# EAGLE board d232_board (EAGLE 9.5.0)
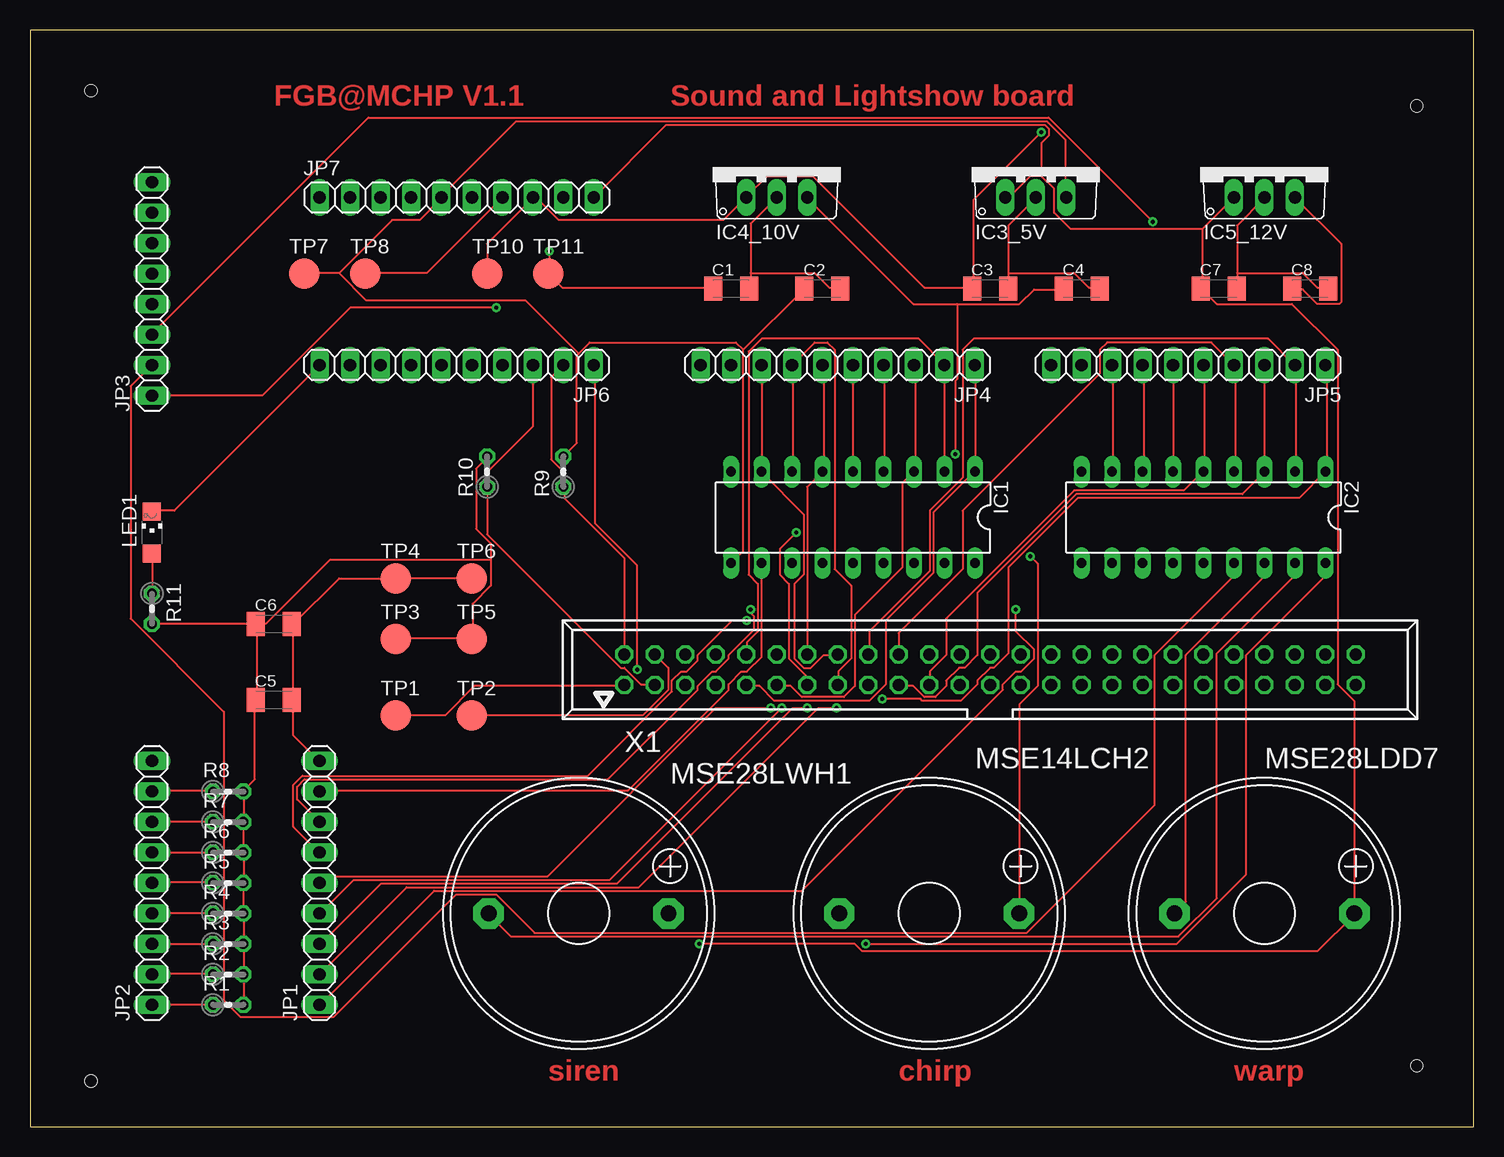
[diagram p0: board, top side]
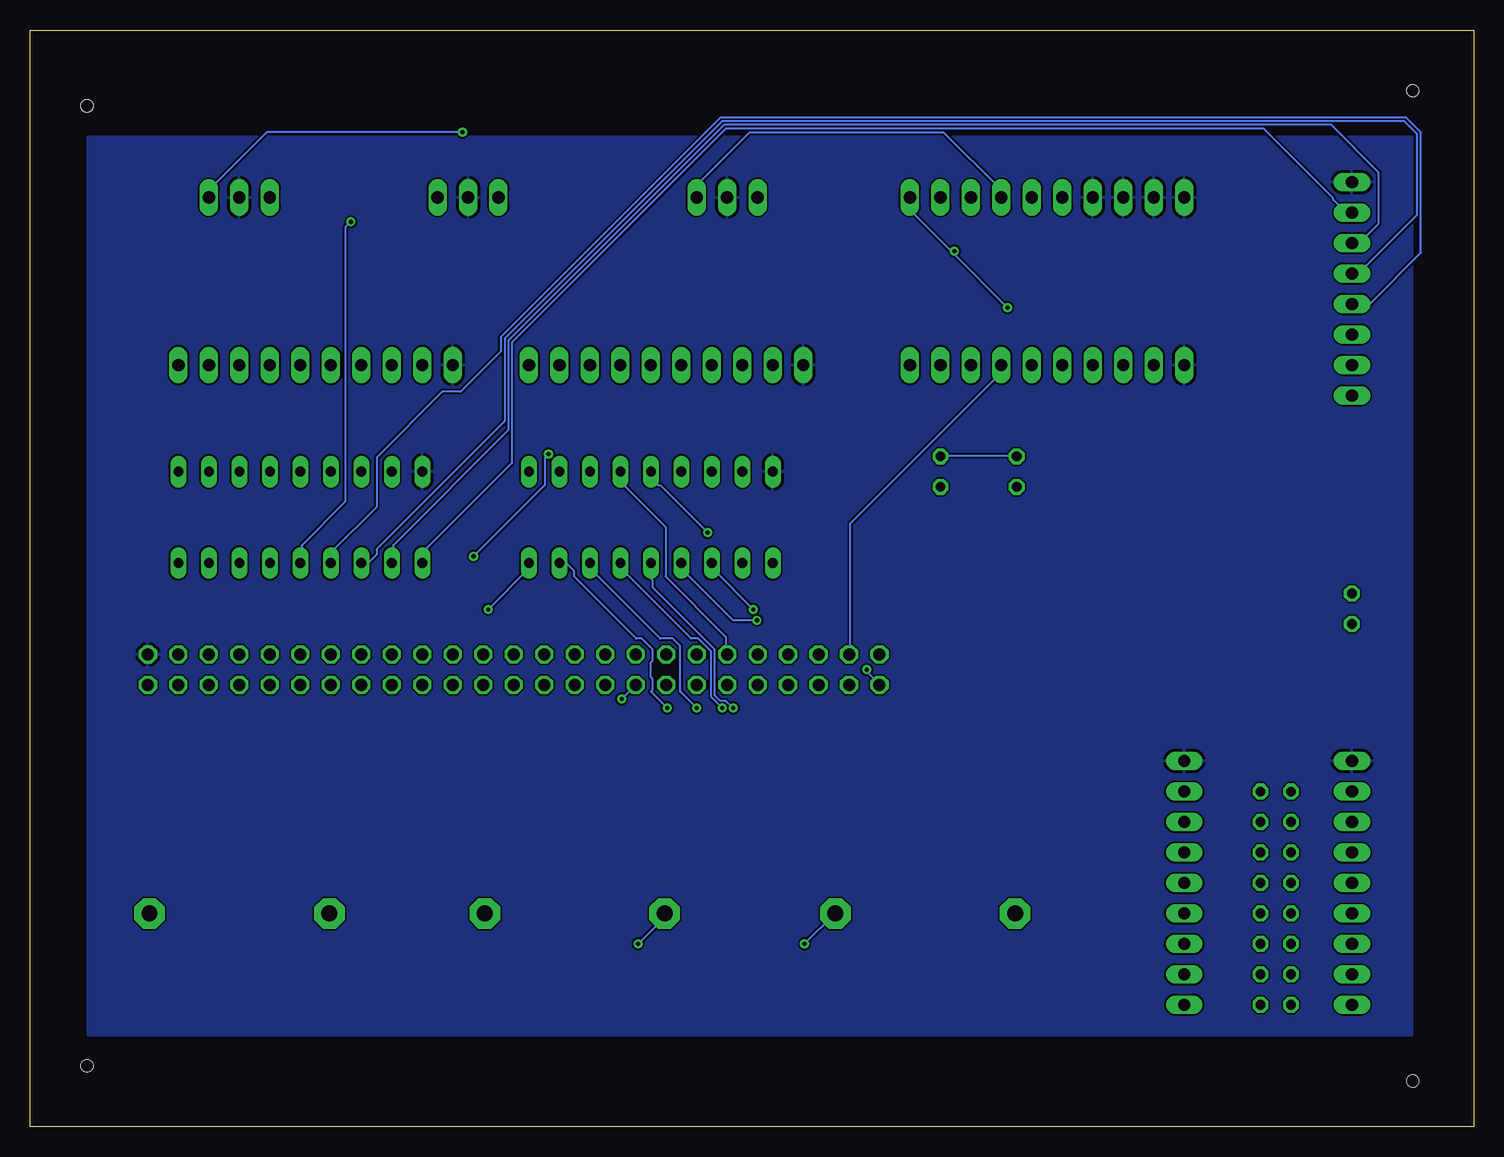
[diagram p1: board, bottom side, seen from below]

Size 120.32 x 91.43 mm. Coordinates in mm from the lower left corner, seen from the top.
Outline: 0,0 120.32,0 120.32,91.43 0,91.43 0,0
Copper layers (1*16): Top 0.035mm / dielectric 1.5mm / Bottom 0.035mm
Design rules "default": minimum track width 6mil, minimum drill 0.35mm, track to track 6mil, track to pad 6mil, pad to pad 6mil, via to via 6mil, smd to smd 6mil, copper to edge 40mil, drill to drill 6mil, minimum pad ring 10mil, minimum via ring 8mil, stop-mask expansion 4mil, vias tented up to drill 0mil, thermal gap 10mil
Holes 1 mm at 5.08,86.36 115.57,85.09 115.57,5.08 5.08,3.81

## Footprints (pad centres in the part's own frame; a part is rotated, then mirrored left to right if it is on the bottom)
C1206K = smd 1.5 x 2: 1 -1.5,0; 2 1.5,0
DIL18 = drill 0.813 long: 1 -10.16,-3.81; 2 -7.62,-3.81; 3 -5.08,-3.81; 4 -2.54,-3.81; 5 0,-3.81; 6 2.54,-3.81; 7 5.08,-3.81; 8 7.62,-3.81; 9 10.16,-3.81; 10 10.16,3.81; 11 7.62,3.81; 12 5.08,3.81; 13 2.54,3.81; 14 0,3.81; 15 -2.54,3.81; 16 -5.08,3.81; 17 -7.62,3.81; 18 -10.16,3.81
TO220V = drill 1.016 long: 1 -2.54,-2.54; 2 0,-2.54; 3 2.54,-2.54
1X09 = drill 1.016 long: 1 -10.16,0; 2 -7.62,0; 3 -5.08,0; 4 -2.54,0; 5 0,0; 6 2.54,0; 7 5.08,0; 8 7.62,0; 9 10.16,0
1X08 = drill 1.016 long: 1 -8.89,0; 2 -6.35,0; 3 -3.81,0; 4 -1.27,0; 5 1.27,0; 6 3.81,0; 7 6.35,0; 8 8.89,0
1X10 = drill 1.016 long: 1 -11.43,0; 2 -8.89,0; 3 -6.35,0; 4 -3.81,0; 5 -1.27,0; 6 1.27,0; 7 3.81,0; 8 6.35,0; 9 8.89,0; 10 11.43,0
CHIPLED_1206 = smd 1.5 x 1.5: A 0,-1.75; C 0,1.75
EB2209A = drill 1.321 pad 2.54 octagon: + 7.493,0; - -7.493,0
0204V = drill 0.813 octagon: 1 -1.27,0; 2 1.27,0
B2,54 = smd 2.54 x 2.54: TP 0,0
057-050-1 = drill 1 octagon: 1 -30.48,-1.27; 2 -30.48,1.27; 3 -27.94,-1.27; 4 -27.94,1.27; 5 -25.4,-1.27; 6 -25.4,1.27; 7 -22.86,-1.27; 8 -22.86,1.27; 9 -20.32,-1.27; 10 -20.32,1.27; 11 -17.78,-1.27; 12 -17.78,1.27; 13 -15.24,-1.27; 14 -15.24,1.27; 15 -12.7,-1.27; 16 -12.7,1.27; 17 -10.16,-1.27; 18 -10.16,1.27; 19 -7.62,-1.27; 20 -7.62,1.27; 21 -5.08,-1.27; 22 -5.08,1.27; 23 -2.54,-1.27; 24 -2.54,1.27; 25 0,-1.27; 26 0,1.27; 27 2.54,-1.27; 28 2.54,1.27; 29 5.08,-1.27; 30 5.08,1.27; 31 7.62,-1.27; 32 7.62,1.27; 33 10.16,-1.27; 34 10.16,1.27; 35 12.7,-1.27; 36 12.7,1.27; 37 15.24,-1.27; 38 15.24,1.27; 39 17.78,-1.27; 40 17.78,1.27; 41 20.32,-1.27; 42 20.32,1.27; 43 22.86,-1.27; 44 22.86,1.27; 45 25.4,-1.27; 46 25.4,1.27; 47 27.94,-1.27; 48 27.94,1.27; 49 30.48,-1.27; 50 30.48,1.27

## Placement (x,y rotation side)
C1  0.47  [C1206K]  58.42,69.85 0 top
C2  22uf  [C1206K]  66.04,69.85 0 top
C3  0.47  [C1206K]  80.01,69.85 0 top
C4  22uf  [C1206K]  87.63,69.85 0 top
C5  22uf  [C1206K]  20.32,35.56 0 top
C6  0.47  [C1206K]  20.32,41.91 0 top
C7  0.47  [C1206K]  99.06,69.85 0 top
C8  22uf  [C1206K]  106.68,69.85 0 top
IC1  uln2803  [DIL18]  68.58,50.8 180 top
IC2  uln2803  [DIL18]  97.79,50.8 180 top
IC3_5V  7805TV  [TO220V]  83.82,80.01 0 top
IC4_10V  7805TV  [TO220V]  62.23,80.01 0 top
IC5_12V  7805TV  [TO220V]  102.87,80.01 0 top
JP1  LEDC  [1X09]  24.13,20.32 90 top
JP2  LEDP  [1X09]  10.16,20.32 90 top
JP3  PORTIO  [1X08]  10.16,69.85 90 top
JP4  PORT2  [1X10]  67.31,63.5 180 top
JP5  PORT3  [1X10]  96.52,63.5 180 top
JP6  PORT1  [1X10]  35.56,63.5 180 top
JP7  DC POWER  [1X10]  35.56,77.47 0 top
LED1  PWR  [CHIPLED_1206]  10.16,49.53 0 top
MSE14LCH2  EB2209A  [EB2209A]  74.93,17.78 0 top
MSE28LDD7  EB2209A  [EB2209A]  102.87,17.78 0 top
MSE28LWH1  EB2209A  [EB2209A]  45.72,17.78 0 top
R1  91  [0204V]  16.51,10.16 0 top
R2  91  [0204V]  16.51,12.7 0 top
R3  91  [0204V]  16.51,15.24 0 top
R4  91  [0204V]  16.51,17.78 0 top
R5  91  [0204V]  16.51,20.32 0 top
R6  91  [0204V]  16.51,22.86 0 top
R7  91  [0204V]  16.51,25.4 0 top
R8  91  [0204V]  16.51,27.94 0 top
R9  91  [0204V]  44.45,54.61 90 top
R10  91  [0204V]  38.1,54.61 90 top
R11  1k  [0204V]  10.16,43.18 270 top
TP1  TPB2,54  [B2,54]  30.48,34.29 0 top
TP2  TPB2,54  [B2,54]  36.83,34.29 0 top
TP3  TPB2,54  [B2,54]  30.48,40.64 0 top
TP4  TPB2,54  [B2,54]  30.48,45.72 0 top
TP5  TPB2,54  [B2,54]  36.83,40.64 0 top
TP6  TPB2,54  [B2,54]  36.83,45.72 0 top
TP7  TPB2,54  [B2,54]  22.86,71.12 0 top
TP8  TPB2,54  [B2,54]  27.94,71.12 0 top
TP10  TPB2,54  [B2,54]  38.1,71.12 0 top
TP11  TPB2,54  [B2,54]  43.18,71.12 0 top
X1  057-050-1  [057-050-1]  80.01,38.1 0 top

## Library data of the parts
C1-C8 = rcl; SPICEPREFIX: C
IC1 IC2 = uln-udn
IC3_5V IC4_10V IC5_12V = linear
JP1-JP7 = pinhead
LED1 = led
MSE14LCH2 MSE28LDD7 MSE28LWH1 = buzzer; OC_FARNELL: unknown; OC_NEWARK: unknown
R1-R11 = rcl; SPICEPREFIX: R
TP1-TP8 TP10 TP11 = testpad
X1 = con-panduit; OC_FARNELL: unknown; OC_NEWARK: unknown

## Nets
+5V: C2.1 C5.1 C6.1 IC1.10 IC3_5V.3 JP7.5 R1.2 R2.2 R3.2 R4.2 R5.2 R6.2 R7.2 R8.2 R9.2 R10.2 R11.2 TP3.TP TP5.TP TP7.TP
+10V: C4.1 IC4_10V.3 JP7.7 MSE14LCH2.+ TP8.TP
+12V: C3.1 C8.1 IC4_10V.1 IC5_12V.3 JP7.8 TP10.TP
+24V: C1.1 C7.1 IC3_5V.1 IC5_12V.1 JP3.1 JP7.10 MSE28LDD7.+ MSE28LWH1.+ TP11.TP
GND: C1.2 C2.2 C3.2 C4.2 C5.2 C6.2 C7.2 C8.2 IC1.9 IC2.9 IC3_5V.2 IC4_10V.2 IC5_12V.2 JP1.9 JP2.9 JP3.8 JP4.10 JP5.10 JP6.10 JP7.1 JP7.2 JP7.3 JP7.4 LED1.C TP4.TP TP6.TP X1.50
N$1: IC1.18 JP1.1
N$2: IC1.17 JP1.2
N$3: IC1.16 JP1.3
N$4: IC1.15 JP1.4
N$5: IC1.14 JP1.5
N$6: IC1.13 JP1.6
N$7: IC1.12 JP1.7
N$8: IC1.11 JP1.8
N$9: IC1.1 JP4.1 X1.9
N$10: IC1.2 JP4.2 X1.10
N$11: IC1.3 JP4.3 X1.11
N$12: IC1.4 JP4.4 X1.12
N$13: IC1.5 JP4.5 X1.13
N$14: IC1.6 JP4.6 X1.14
N$15: IC1.7 JP4.7 X1.15
N$16: IC1.8 JP4.8 X1.16
N$17: IC2.1 JP5.1 X1.17
N$18: IC2.2 JP5.2 X1.18
N$19: IC2.3 JP5.3 X1.19
N$20: IC2.4 JP5.4 X1.20
N$21: IC2.5 JP5.5 X1.21
N$22: IC2.6 JP5.6
N$23: IC2.7 JP5.7
N$24: IC2.8 JP5.8
N$25: IC2.18 MSE14LCH2.-
N$26: IC2.17 MSE28LWH1.-
N$27: IC2.16 MSE28LDD7.-
N$28: JP6.1 TP1.TP X1.1
N$29: JP6.2 R9.1 X1.2
N$30: JP6.3 R10.1 X1.3
N$31: JP6.4 TP2.TP X1.4
N$32: JP2.1 R1.1
N$33: JP2.2 R2.1
N$34: JP2.3 R3.1
N$35: JP2.4 R4.1
N$36: JP2.5 R5.1
N$37: JP2.6 R6.1
N$38: JP2.7 R7.1
N$39: JP2.8 R8.1
N$40: IC2.15 JP3.2
N$41: IC2.14 JP3.3
N$42: IC2.13 JP3.4
N$43: IC2.12 JP3.5
N$44: IC2.11 JP3.6
N$45: IC2.10 JP3.7
N$46: LED1.A R11.1

## Tracks (layer width: path | path; a pad name or v marks a point on that pad's centre or on a via)
+5V
  Top 0.152: 25.76,71.17 22.86,71.17 TP7.TP | 25.76,71.17 30.17,75.59 32.46,75.59 34.29,77.42 JP7.5 34.29,77.57 40.54,83.82 84.73,83.82 86.26,82.3 86.26,77.57 IC3_5V.3 | 18.9,41.91 18.9,35.66 C5.1 18.75,35.51 18.75,28.96 17.83,28.04 R8.2 17.83,27.89 17.83,25.45 R7.2 17.83,25.3 17.83,22.86 | R11.2 C6.1 18.9,41.91 | 17.83,22.86 17.83,20.42 R5.2 17.83,20.27 17.83,17.83 R4.2 17.83,17.68 17.83,15.24 | R1.2 17.83,10.21 17.83,12.65 R2.2 17.83,12.8 17.83,15.24 | 17.83,15.24 R3.2 | 17.83,22.86 R6.2 | 59.44,64.77 64.47,69.8 C2.1 | 59.44,64.77 59.44,48.01 IC1.10 | TP3.TP 30.48,40.69 36.73,40.69 TP5.TP 36.88,40.69 36.88,43.59 38.41,45.11 38.41,47.24 | 38.41,47.24 38.41,48.62 37.19,49.84 37.19,54.86 38.1,55.78 R10.2 | 59.44,64.77 58.83,65.38 46.63,65.38 45.72,64.47 | 45.72,64.47 45.57,64.31 45.57,57 R9.2 | 18.9,41.91 19.66,41.91 24.99,47.24 38.41,47.24 | 25.76,71.17 28.04,68.89 41.3,68.89 45.72,64.47
  Bottom 0.152: R10.2 38.1,55.93 44.35,55.93 R9.2
+10V  (via drill 0.35)
  Top 0.152: JP7.7 33.07,71.17 28.04,71.17 TP8.TP | 77.27,68.58 73.61,68.58 64.77,77.42 IC4_10V.3 | 77.27,68.58 82.45,68.58 83.67,69.8 86.11,69.8 C4.1 | v83.36,47.55 83.97,46.94 83.97,36.73 82.45,35.2 82.45,17.83 MSE14LCH2.+ | v77.11,56.08 77.11,62.18 77.27,62.33 77.27,68.58
  Bottom 0.152: v83.36,47.55 77.42,53.49 77.42,55.78 v77.11,56.08 | IC4_10V.3 64.77,78.49 60.35,82.91 44.2,82.91 39.47,78.18 39.47,77.57 JP7.7
+12V  (via drill 0.35)
  Top 0.152: TP10.TP 38.1,73.61 41.91,77.42 | IC5_12V.3 109.27,73.61 109.27,68.73 109.12,68.58 107.29,68.58 106.07,69.8 105.31,69.8 C8.1 | v84.28,82.91 78.64,77.27 78.64,69.95 C3.1 78.49,69.95 74.52,69.95 65.23,79.25 61.42,79.25 59.74,77.57 IC4_10V.1 59.59,77.42 57.76,75.59 44.04,75.59 42.22,77.42 41.91,77.42 | 41.91,77.42 JP7.8
  Bottom 0.152: v84.28,82.91 100.58,82.91 105.31,78.18 105.31,77.57 IC5_12V.3
+24V  (via drill 0.35)
  Top 0.152: v55.78,15.24 68.73,15.24 69.34,14.63 107.29,14.63 110.34,17.68 MSE28LDD7.+ 110.34,17.83 110.34,35.51 108.97,36.88 108.97,64.77 105.16,68.58 98.91,68.58 97.69,69.8 C7.1 97.69,69.95 97.69,74.83 | IC5_12V.1 97.69,74.83 | 84.28,79.25 83.36,79.25 81.69,77.57 81.38,77.57 IC3_5V.1 | 84.28,79.25 85.34,78.18 85.34,76.2 86.72,74.83 97.69,74.83 | C1.1 56.84,69.95 44.35,69.95 TP11.TP 43.28,71.17 v43.28,73 | JP3.1 19.36,60.96 26.67,68.28 v38.86,68.28 | 84.28,79.25 84.28,81.99 84.89,82.6 84.89,83.21 84.58,83.52 53.04,83.52 JP7.10
  Bottom 0.152: v55.78,15.24 53.34,17.68 MSE28LWH1.+ | 43.43,72.85 46.94,76.35 46.94,77.42 JP7.10 | 43.43,72.85 v38.86,68.28 | 43.43,72.85 v43.28,73
GND
  Top 0.152: TP6.TP TP4.TP 25.76,45.72 21.95,41.91 | LED1.C 10.21,51.36 12.04,51.36 24.08,63.4 JP6.10 | JP1.9 24.08,30.48 21.95,32.61 21.95,35.51 C5.2 21.95,35.66 21.95,41.91 | 60.05,71.17 60.05,75.29 IC4_10V.2 | 60.05,71.17 60.05,69.95 C1.2 | 60.05,71.17 65.38,71.17 66.6,69.95 67.51,69.95 C2.2 | 81.53,71.17 81.53,75.13 83.82,77.42 IC3_5V.2 | 81.53,71.17 81.53,69.95 C3.2 | 81.53,71.17 87.02,71.17 88.24,69.95 89,69.95 C4.2 | 100.58,71.17 100.58,75.13 102.87,77.42 IC5_12V.2 | 100.58,71.17 100.58,69.95 C7.2 | 100.58,71.17 106.07,71.17 107.29,69.95 108.05,69.95 C8.2 | 21.95,41.91 C6.2
  pour Bottom: 5.08,82.55 115.57,82.55 115.57,7.62 5.08,7.62
N$1  (via drill 0.35)
  Top 0.152: v82.14,43.13 82.14,41.3 83.67,39.78 83.67,39.01 82.6,37.95 82.14,37.95 81.08,36.88 81.08,36.42 64.31,19.66 33.68,19.66 24.23,10.21 JP1.1
  Bottom 0.152: v82.14,43.13 78.79,46.48 78.79,46.94 IC1.18
N$2  (via drill 0.35)
  Top 0.152: v67.21,34.9 65.68,34.9 50.75,19.96 31.39,19.96 JP1.2
  Bottom 0.152: v67.21,34.9 68.58,36.27 68.43,36.42 68.43,37.34 68.58,37.49 68.58,38.71 68.43,38.86 68.43,39.78 69.34,40.69 69.8,40.69 74.98,45.87 74.98,46.33 75.59,46.94 76.2,46.94 IC1.17
N$3  (via drill 0.35)
  Top 0.152: v64.77,34.9 63.55,34.9 48.92,20.27 29.26,20.27 24.23,15.24 JP1.3
  Bottom 0.152: v64.77,34.9 66.14,36.27 66.14,40.08 66.75,40.69 67.82,40.69 73.61,46.48 73.61,46.94 IC1.16
N$4  (via drill 0.35)
  Top 0.152: v62.64,34.9 48.31,20.57 26.97,20.57 24.23,17.83 JP1.4
  Bottom 0.152: v62.64,34.9 63.55,35.81 63.55,39.62 64.62,40.69 65.23,40.69 71.02,46.48 71.02,46.94 IC1.15
N$5  (via drill 0.35)
  Top 0.152: v61.72,34.9 57.15,34.9 43.13,20.88 24.69,20.88 JP1.5
  Bottom 0.152: IC1.14 68.58,45.72 68.43,45.57 68.43,44.96 63.25,39.78 63.25,35.97 62.79,35.51 62.33,35.51 v61.72,34.9
N$6  (via drill 0.35)
  Top 0.152: v59.74,42.21 58.52,42.21 55.63,39.32 55.63,38.86 54.71,37.95 54.25,37.95 53.49,37.19 53.49,36.27 46.48,29.26 22.71,29.26 21.95,28.5 21.95,24.99 24.08,22.86 JP1.6
  Bottom 0.152: v59.74,42.21 61.72,42.21 65.99,46.48 65.99,46.94 IC1.13
N$7  (via drill 0.35)
  Top 0.152: v60.05,43.13 60.05,42.82 60.35,42.52 60.35,41.45 58.22,39.32 58.22,39.01 57.15,37.95 56.84,37.95 55.63,36.73 55.63,36.42 48.16,28.96 22.86,28.96 22.25,28.35 22.25,27.28 JP1.7
  Bottom 0.152: v60.05,43.13 63.4,46.48 63.4,46.94 IC1.12
N$8
  Top 0.152: IC1.11 60.96,39.17 59.74,37.95 59.28,37.95 58.22,36.88 58.22,36.42 49.84,28.04 24.23,28.04 JP1.8
N$9
  Top 0.152: JP4.1 78.79,63.4 78.79,54.71 IC1.1 78.64,54.56 75.29,51.21 75.29,46.18 71.32,42.21 71.32,36.88 69.95,35.51 62.03,35.51 60.81,36.73 59.74,36.73 X1.9
N$10
  Top 0.152: IC1.2 JP4.2 76.2,63.55 74.07,65.68 60.96,65.68 59.89,64.62 59.89,46.02 60.66,45.26 60.66,41.3 59.74,40.39 59.74,39.47 X1.10
N$11
  Top 0.152: JP4.3 73.76,63.4 73.76,54.71 IC1.3 72.7,53.64 72.7,46.63 68.73,42.67 68.73,36.73 67.82,35.81 64.31,35.81 63.4,36.73 62.33,36.73 X1.11
N$12
  Top 0.152: IC1.4 71.17,54.71 71.17,63.4 JP4.4
  Bottom 0.152: X1.12 62.33,39.47 62.33,40.84 67.36,45.87 67.36,49.99 71.02,53.64 71.02,54.56 IC1.4
N$13  (via drill 0.35)
  Top 0.152: JP4.5 IC1.5 | X1.13 64.77,37.49 63.25,39.01 63.25,45.26 62.48,46.02 62.48,48.16 v63.86,49.53
  Bottom 0.152: v63.86,49.53 67.82,53.49 67.97,53.49 68.58,54.1 IC1.5
N$14
  Top 0.152: JP4.6 66.14,63.4 66.14,54.71 IC1.6 64.77,53.34 X1.14
N$15
  Top 0.152: IC1.7 63.55,54.71 63.55,63.4 JP4.7 65.38,65.38 66.45,65.38 67.06,64.77 67.06,46.48 68.43,45.11 68.43,39.01 67.36,37.95 67.36,36.88 X1.15
N$16
  Top 0.152: JP4.8 IC1.8 60.96,54.56 64.47,51.05 64.47,46.02 63.7,45.26 63.7,39.01 64.47,38.25 65.08,38.25 66.14,39.32 67.21,39.32 X1.16
N$17  (via drill 0.35)
  Top 0.152: JP5.1 108.05,63.4 108.05,54.71 IC2.1 105.77,52.43 87.33,52.43 81.53,46.63 81.53,39.47 80.31,38.25 80.01,38.25 78.94,37.19 78.94,36.88 77.57,35.51 74.37,35.51 74.22,35.66 v71.02,35.66
  Bottom 0.152: v71.02,35.66 X1.17
N$18
  Top 0.152: IC2.2 105.46,54.71 105.46,63.4 JP5.2 105.31,63.55 103.17,65.68 78.64,65.68 77.72,64.77 77.72,54.1 74.98,51.36 74.98,46.33 69.95,41.3 69.95,39.47 X1.18
N$19
  Top 0.152: JP5.3 IC2.3 102.87,54.56 101.04,52.73 87.17,52.73 78.94,44.5 78.94,39.32 77.88,38.25 77.42,38.25 76.35,37.19 76.35,36.73 75.44,35.81 74.52,35.81 73.61,36.73 72.39,36.73 X1.19
N$20
  Top 0.152: IC2.4 100.43,54.71 100.43,63.4 JP5.4 98.45,65.38 89.76,65.38 89.15,64.77 89.15,62.79 77.72,51.36 77.72,46.48 72.39,41.15 X1.20
N$21
  Top 0.152: JP5.5 97.84,63.4 97.84,54.71 IC2.5 97.69,54.56 96.16,53.03 87.02,53.03 76.35,42.37 76.35,39.32 74.98,37.95 74.98,36.88 X1.21
N$22
  Top 0.152: JP5.6 IC2.6
N$23
  Top 0.152: IC2.7 92.81,54.71 92.81,63.4 JP5.7
N$24
  Top 0.152: IC2.8 90.22,54.71 90.22,63.4 JP5.8
N$25  (via drill 0.35)
  Top 0.152: v69.65,15.24 95.56,15.24 101.35,21.03 101.35,39.32 107.9,45.87 107.9,46.94 IC2.18
  Bottom 0.152: v69.65,15.24 67.51,17.37 67.51,17.68 MSE14LCH2.-
N$26
  Top 0.152: IC2.17 105.31,46.94 105.31,45.87 98.91,39.47 98.91,19.05 95.71,15.85 40.08,15.85 38.25,17.68 MSE28LWH1.-
N$27
  Top 0.152: IC2.16 102.87,45.87 96.32,39.32 96.32,18.75 95.4,17.83 MSE28LDD7.-
N$28  (via drill 0.35)
  Top 0.152: TP1.TP 34.59,34.29 37.03,36.73 49.53,36.73 X1.1 | v50.6,38.1 50.6,46.79 47.09,50.29 47.09,63.4 JP6.1
  Bottom 0.152: v50.6,38.1 50.6,37.95 49.53,36.88 X1.1
N$29
  Top 0.152: JP6.2 43.43,62.48 43.43,55.63 44.35,54.71 44.35,53.34 R9.1 44.5,53.34 44.5,52.43 49.53,47.4 X1.2
N$30
  Top 0.152: JP6.3 41.91,58.37 38.1,54.56 R10.1 38.1,49.38 49.23,38.25 49.53,38.25 50.9,36.88 51.97,36.88 X1.3
N$31
  Top 0.152: TP2.TP 51.05,34.29 53.19,36.42 53.19,38.25 X1.4
  Bottom 0.152: JP6.4 39.47,63.4 39.47,62.79 51.97,50.29 51.97,39.47 X1.4
N$32
  Top 0.152: R1.1 15.24,10.21 10.21,10.21 JP2.1
N$33
  Top 0.152: R2.1 15.24,12.8 10.21,12.8 JP2.2
N$34
  Top 0.152: JP2.3 R3.1
N$35
  Top 0.152: R4.1 15.24,17.83 10.21,17.83 JP2.4
N$36
  Top 0.152: R5.1 15.24,20.42 10.21,20.42 JP2.5
N$37
  Top 0.152: JP2.6 R6.1
N$38
  Top 0.152: R7.1 15.24,25.45 10.21,25.45 JP2.7
N$39
  Top 0.152: R8.1 15.24,28.04 10.21,28.04 JP2.8
N$40
  Top 0.152: JP3.2 8.38,61.72 8.38,42.37 16.15,34.59 16.15,10.52 17.53,9.14 25.3,9.14 35.51,19.36 38.86,19.36 42.06,16.15 83.06,16.15 93.73,26.82 93.73,39.32 100.28,45.87 100.28,46.94 IC2.15
N$41  (via drill 0.35)
  Top 0.152: v93.57,75.44 84.89,84.12 28.19,84.12 10.21,66.14 JP3.3
  Bottom 0.152: v93.57,75.44 94.03,74.98 94.03,52.12 97.69,48.46 97.69,47.09 IC2.14
N$42
  Bottom 0.152: IC2.13 95.25,47.85 91.44,51.66 91.44,55.78 85.95,61.27 84.43,61.27 81.08,64.62 81.08,65.84 62.79,84.12 5.64,84.12 4.42,82.91 4.42,72.85 8.69,68.58 JP3.4
N$43
  Bottom 0.152: IC2.12 92.66,47.09 92.05,47.09 91.44,47.7 91.44,48.16 80.77,58.83 80.77,65.68 62.64,83.82 5.79,83.82 4.72,82.75 4.72,76.05 9.6,71.17 10.06,71.17 JP3.5
N$44
  Bottom 0.152: IC2.11 90.07,47.09 90.07,48.46 80.47,58.06 80.47,65.53 62.48,83.52 11.89,83.52 7.93,79.55 7.93,75.29 9.45,73.76 10.06,73.76 JP3.6
N$45
  Bottom 0.152: IC2.10 87.63,47.85 80.16,55.32 80.16,65.38 62.33,83.21 17.53,83.21 11.73,77.42 11.73,77.27 10.67,76.2 JP3.7
N$46
  Top 0.152: LED1.A 10.21,47.7 10.21,44.5 R11.1

## Text on the board
Top: FGB@MCHP V1.1 | Sound and Lightshow board | siren | chirp | warp